# EAGLE board PanelizedBoard (EAGLE 7.2.0), part 1 of 2
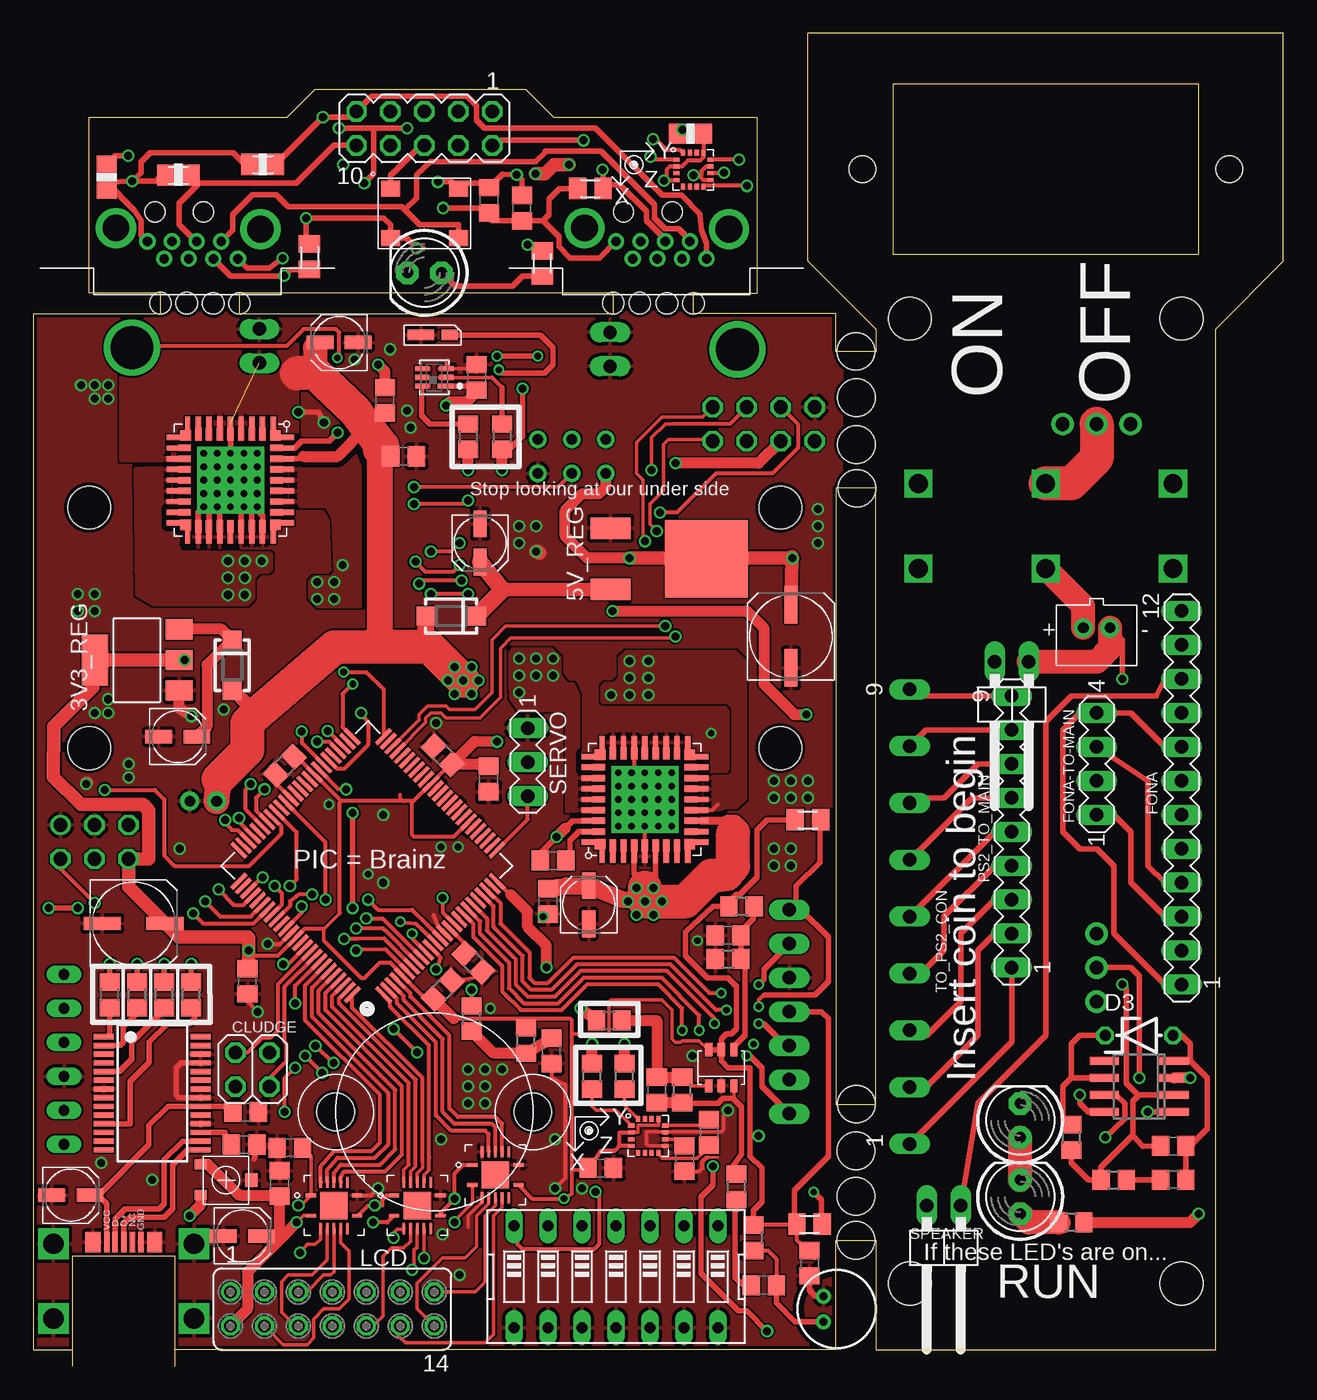
[diagram p0: board, top side]
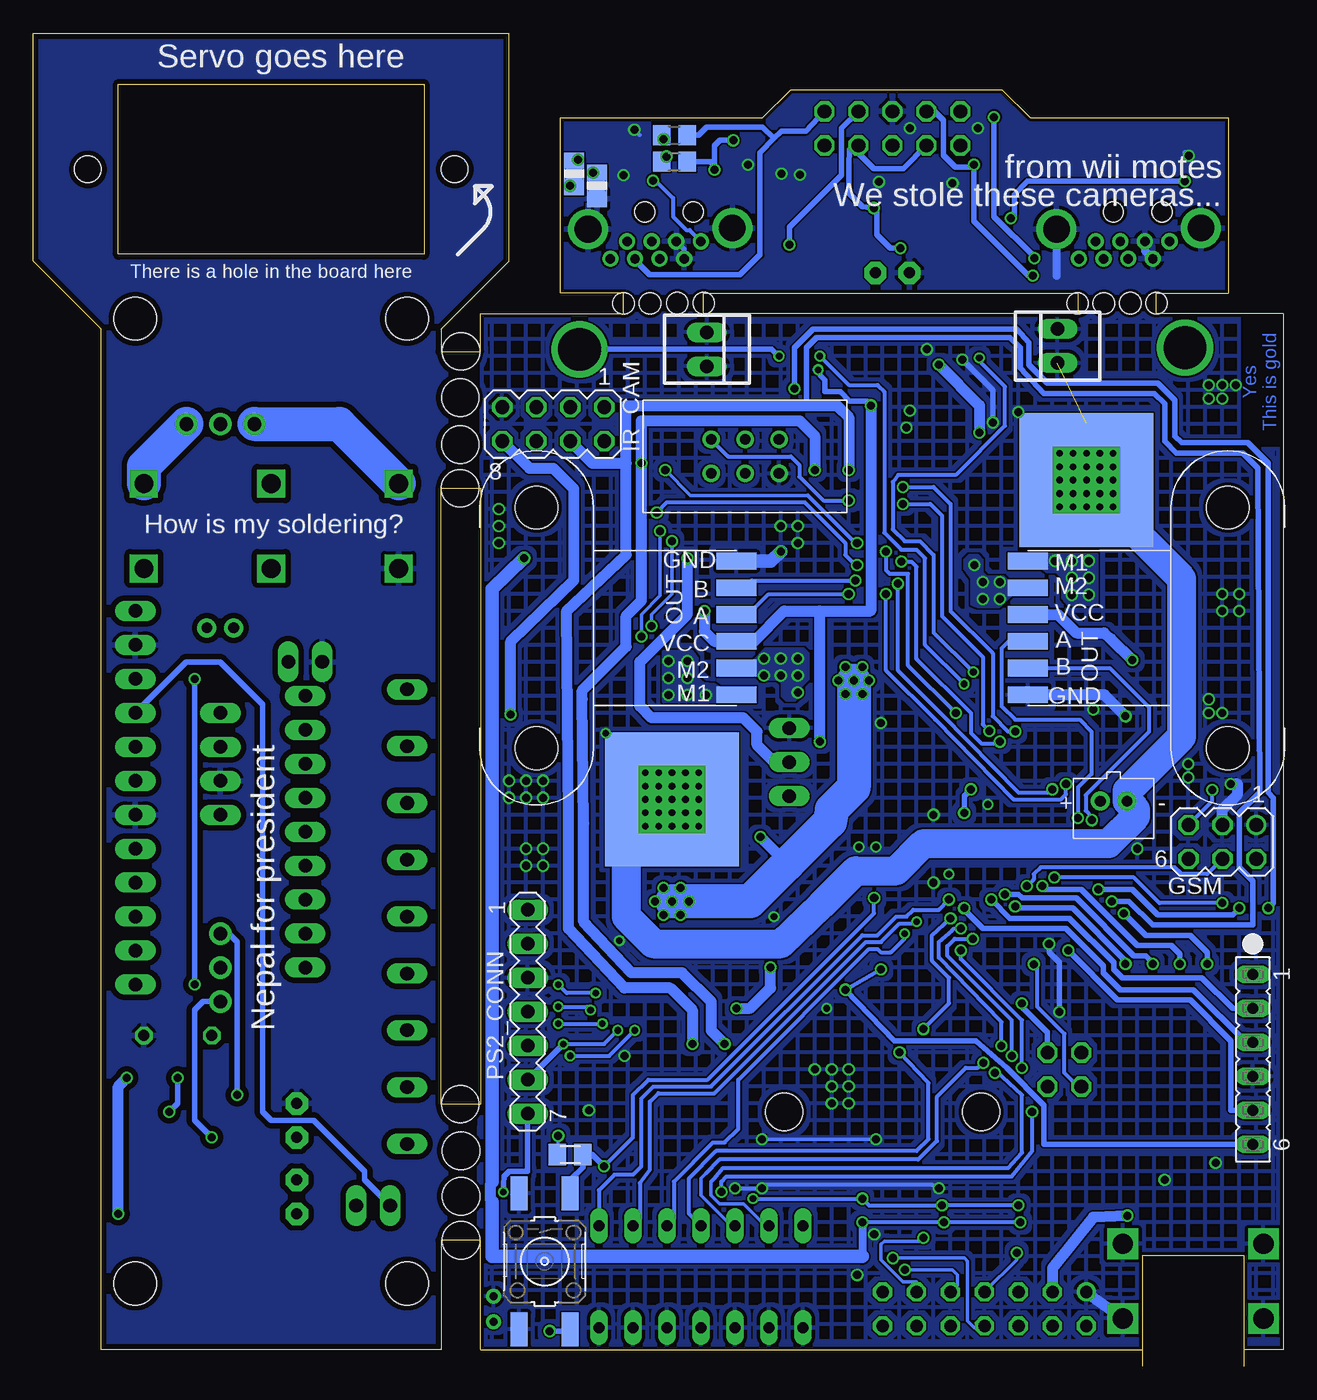
[diagram p1: board, bottom side, seen from below]

Size 93.47 x 99.64 mm. Coordinates in mm from the lower left corner, seen from the top.
Outline: 2.92,1.22 0,1.22 0,78.69 9.52,78.69 9.52,80.24 4.14,80.24 4.14,93.34 18.94,93.34 21.04,95.44 36.84,95.44 38.94,93.34 54.1,93.35 54.1,80.24 49.35,80.24 49.36,78.69 60.02,78.69 60.02,75.87 62.99,75.87 62.99,77.55 57.91,82.63 57.91,99.64 93.47,99.64 93.47,82.63 88.39,77.55 88.39,1.22 62.99,1.22 62.99,9.4 60.02,9.4 60.02,1.22 10.54,1.22
Outline: 87.12,95.83 64.26,95.83 64.26,83.13 87.12,83.13 87.12,95.83
Outline: 15.39,78.69 43.36,78.69 43.36,80.24 15.39,80.24 15.39,78.69
Outline: 62.99,65.63 60.02,65.63 60.02,19.58 62.99,19.58 62.99,65.63
Copper layers (1*16): Top 0.035mm / dielectric 1.5mm / Bottom 0.035mm
Design rules "dirt_cheap_dirty_boards.v1": minimum track width 5mil, minimum drill 12mil, track to track 5mil, track to pad 5mil, pad to pad 5mil, via to via 5mil, smd to smd 0mil, copper to edge 10mil, drill to drill 10mil, minimum pad ring 10mil, minimum via ring 6mil, stop-mask expansion 2mil, vias tented up to drill 25mil, thermal gap 10mil
Holes 2 mm at 89.41,89.48 61.98,89.48
Holes 3.2 mm at 65.53,6.17 85.85,6.17 85.85,78.31 65.53,78.31
Holes 1.6 mm at 15.39,79.45 13.44,79.45 11.46,79.48 9.5,79.48 49.35,79.45 47.37,79.45 45.34,79.48 43.36,79.48
Holes 2.8 mm at 61.49,9.4 61.49,12.7 61.49,16.1 61.54,19.58 61.49,75.87 61.54,72.42 61.54,68.91 61.57,65.63
vRestrict: area 106.2,0.6 to 206.2,100.6

## Footprints (pad centres in the part's own frame; a part is rotated, then mirrored left to right if it is on the bottom)
SOT223 = smd 1.499 x 2.007: 1 -2.261,-3.15; 2 0.025,-3.15; 3 2.311,-3.15 | smd 3.81 x 2.007: 4 0,3.15
DPAK-2 = smd 3 x 1.6: 1 -1.5,0.8; 3 -1.5,5.37 | smd 6.2 x 5.8: 2 -8.68,3.085
UD-4X5,8_NICHICON = smd 2 x 1: + 1.425,0; - -1.425,0
JST-PH-2-THM = drill 0.8 pad 1.422: 1 1,0; 2 -1,0
UD-6,3X5,8_NICHICON = smd 2.8 x 1: + 2.35,0; - -2.35,0
C0805 = smd 1.3 x 1.5: 1 -0.95,0; 2 0.95,0
2X02 = drill 1.016 octagon: 1 -1.27,-1.27; 2 -1.27,1.27; 3 1.27,-1.27; 4 1.27,1.27
SOD123 = smd 1.4 x 1.4: A 1.9,0; C -1.9,0
ZDIO-5 = drill 0.813 octagon: A 2.54,0; C -2.54,0
MA12-1 = drill 1.016 long: 1 -13.97,0; 2 -11.43,0; 3 -8.89,0; 4 -6.35,0; 5 -3.81,0; 6 -1.27,0; 7 1.27,0; 8 3.81,0; 9 6.35,0; 10 8.89,0; 11 11.43,0; 12 13.97,0
MA04-1 = drill 1.016 long: 1 -3.81,0; 2 -1.27,0; 3 1.27,0; 4 3.81,0
MA03-2 = drill 1.016: 1 -2.54,-1.27 | drill 1.016 octagon: 2 -2.54,1.27; 3 0,-1.27; 4 0,1.27; 5 2.54,-1.27; 6 2.54,1.27
SSOP28 = smd 0.4 x 1.5: 1 -4.225,-3.625; 2 -3.575,-3.625; 3 -2.925,-3.625; 4 -2.275,-3.625; 5 -1.625,-3.625; 6 -0.975,-3.625; 7 -0.325,-3.625; 8 0.325,-3.625; 9 0.975,-3.625; 10 1.625,-3.625; 11 2.275,-3.625; 12 2.925,-3.625; 13 3.575,-3.625; 14 4.225,-3.625; 15 4.225,3.625; 16 3.575,3.625; 17 2.925,3.625; 18 2.275,3.625; 19 1.625,3.625; 20 0.975,3.625; 21 0.325,3.625; 22 -0.325,3.625; 23 -0.975,3.625; 24 -1.625,3.625; 25 -2.275,3.625; 26 -2.925,3.625; 27 -3.575,3.625; 28 -4.225,3.625
SO08 = smd 0.6 x 2.2: 1 -1.905,-2.6; 2 -0.635,-2.6; 3 0.635,-2.6; 4 1.905,-2.6; 5 1.905,2.6; 6 0.635,2.6; 7 -0.635,2.6; 8 -1.905,2.6
MA04-2 = drill 1.016 octagon: 1 -3.81,-1.27; 2 -3.81,1.27; 3 -1.27,-1.27; 4 -1.27,1.27; 5 1.27,-1.27; 6 1.27,1.27; 7 3.81,-1.27; 8 3.81,1.27
1X02/90 = drill 1.016 long: 1 -1.27,-3.81; 2 1.27,-3.81
FE07-2 = drill 0.914: 1 -7.62,1.27 | drill 0.914 octagon: 2 -7.62,-1.27; 3 -5.08,1.27; 4 -5.08,-1.27; 5 -2.54,1.27; 6 -2.54,-1.27; 7 0,1.27; 8 0,-1.27; 9 2.54,1.27; 10 2.54,-1.27; 11 5.08,1.27; 12 5.08,-1.27; 13 7.62,1.27; 14 7.62,-1.27
LED5MM = drill 0.813 pad 1.676 octagon: A -1.27,0; K 1.27,0
WM-63PR = drill 0.6 pad 1: 1 -1,0.95; 2 -1,-0.95
1X03-CLEANBIG = drill 1.016 pad 1.676: 1 -2.54,0; 2 0,0; 3 2.54,0
MA07-1 = drill 1.016 long: 1 -7.62,0; 2 -5.08,0; 3 -2.54,0; 4 0,0; 5 2.54,0; 6 5.08,0; 7 7.62,0
MA09-1 = drill 1.016 long: 1 -10.16,0; 2 -7.62,0; 3 -5.08,0; 4 -2.54,0; 5 0,0; 6 2.54,0; 7 5.08,0; 8 7.62,0; 9 10.16,0
R0805 = smd 1.3 x 1.5: 1 -0.95,0; 2 0.95,0
M0805 = smd 1.3 x 1.6: 1 -0.95,0; 2 0.95,0
B3F-10XX = smd 2.54 x 1.27: 1 -5.08,1.905; 2 5.08,1.905; 3 -5.08,-1.905; 4 5.08,-1.905
MA03-1 = drill 1.016 long: 1 -2.54,0; 2 0,0; 3 2.54,0
FE06 = drill 0.813 long: 1 -6.35,0; 2 -3.81,0; 3 -1.27,0; 4 1.27,0; 5 3.81,0; 6 6.35,0
MA05-2 = drill 1.016 octagon: 1 -5.08,-1.27; 2 -5.08,1.27; 3 -2.54,-1.27; 4 -2.54,1.27; 5 0,-1.27; 6 0,1.27; 7 2.54,-1.27; 8 2.54,1.27; 9 5.08,-1.27; 10 5.08,1.27
EDG-07 = drill 0.813 long: 1 -7.62,-3.81; 2 -5.08,-3.81; 3 -2.54,-3.81; 4 0,-3.81; 5 2.54,-3.81; 6 5.08,-3.81; 7 7.62,-3.81; 8 7.62,3.81; 9 5.08,3.81; 10 2.54,3.81; 11 0,3.81; 12 -2.54,3.81; 13 -5.08,3.81; 14 -7.62,3.81
MA09-1' = drill 1.016 long: 1 -17,0; 2 -12.75,0; 3 -8.5,0; 4 -4.25,0; 5 0,0; 6 4.25,0; 7 8.5,0; 8 12.75,0; 9 17,0
TCS3472_FN6 = smd 1.2 x 0.4: P$1 -0.85,0.65 | smd 1 x 0.4: P$2 -0.95,0; P$3 -0.95,-0.65; P$4 0.95,-0.65; P$5 0.95,0; P$6 0.95,0.65
QTFP-100 = smd 1.524 x 0.305: P1 -0.1,13.55; P2 -0.1,13.05; P3 -0.1,12.55; P4 -0.1,12.05; P5 -0.1,11.55; P6 -0.1,11.05; P7 -0.1,10.55; P8 -0.1,10.05; P9 -0.1,9.55; P10 -0.1,9.05; P11 -0.1,8.55; P12 -0.1,8.05; P13 -0.1,7.55; P14 -0.1,7.05; P15 -0.1,6.55; P16 -0.1,6.05; P17 -0.1,5.55; P18 -0.1,5.05; P19 -0.1,4.55; P20 -0.1,4.05; P21 -0.1,3.55; P22 -0.1,3.05; P23 -0.1,2.55; P24 -0.1,2.05; P25 -0.1,1.549; P51 15.2,1.549; P52 15.2,2.05; P53 15.2,2.55; P54 15.2,3.05; P55 15.2,3.55; P56 15.2,4.05; P57 15.2,4.55; P58 15.2,5.05; P59 15.2,5.55; P60 15.2,6.05; P61 15.2,6.55; P62 15.2,7.05; P63 15.2,7.55; P64 15.2,8.05; P65 15.2,8.55; P66 15.2,9.05; P67 15.2,9.55; P68 15.2,10.05; P69 15.2,10.55; P70 15.2,11.05; P71 15.2,11.55; P72 15.2,12.05; P73 15.2,12.55; P74 15.2,13.05; P75 15.2,13.55 | smd 0.305 x 1.524: P26 1.549,-0.1; P27 2.05,-0.1; P28 2.55,-0.1; P29 3.05,-0.1; P30 3.55,-0.1; P31 4.05,-0.1; P32 4.55,-0.1; P33 5.05,-0.1; P34 5.55,-0.1; P35 6.05,-0.1; P36 6.55,-0.1; P38 7.55,-0.1; P39 8.05,-0.1; P40 8.55,-0.1; P41 9.05,-0.1; P42 9.55,-0.1; P43 10.05,-0.1; P44 10.55,-0.1; P45 11.05,-0.1; P46 11.55,-0.1; P47 12.05,-0.1; P48 12.55,-0.1; P49 13.05,-0.1; P50 13.55,-0.1; P76 13.55,15.2; P77 13.05,15.2; P78 12.55,15.2; P79 12.05,15.2; P80 11.55,15.2; P81 11.05,15.2; P82 10.55,15.2; P83 10.05,15.2; P84 9.55,15.2; P85 9.05,15.2; P86 8.55,15.2; P87 8.05,15.2; P88 7.55,15.2; P89 7.05,15.2; P90 6.55,15.2; P91 6.05,15.2; P92 5.55,15.2; P93 5.05,15.2; P94 4.55,15.2; P95 4.05,15.2; P96 3.55,15.2; P97 3.05,15.2; P98 2.55,15.2; P99 2.05,15.2; P100 1.549,15.2; P337 7.05,-0.1
MICRO_USB_FCI = smd 0.406 x 1.524: D+ 0,2.921; D- -0.66,2.921; GND 1.27,2.921; ID 0.66,2.921; VCC -1.27,2.921 | smd 1.143 x 1.524: GND1 -2.311,2.921; GND2 2.311,2.921 | drill 1.524 square: P$1 -5.258,2.794; P$2 -5.258,-2.794; P$3 5.258,-2.794; P$4 5.258,2.794
HMC5883L = smd 0.457 x 0.305: P$1 -1.27,0.762; P$2 -1.27,0.254; P$3 -1.27,-0.254; P$4 -1.27,-0.762; P$9 1.27,-0.762; P$10 1.27,-0.254; P$11 1.27,0.254; P$12 1.27,0.762 | smd 0.305 x 0.457: P$5 -0.762,-1.27; P$6 -0.254,-1.27; P$7 0.254,-1.27; P$8 0.762,-1.27; P$13 0.762,1.27; P$14 0.254,1.27; P$15 -0.254,1.27; P$16 -0.762,1.27
OPA334 = smd 0.55 x 1: P$1 -0.95,-1.35; P$2 0,-1.35; P$3 0.95,-1.35; P$4 0.95,1.35; P$5 0,1.35; P$6 -0.95,1.35
LED = smd 1.2 x 0.8: ANODE -1.15,0 | smd 2 x 0.8: CATHODE 1,0
PVG3G-SMT-TRIMMER = smd 0.75 x 0.9: P$1 0.6,-0.2; P$2 2.9,-0.2 | smd 1 x 0.9: P$3 1.8,3.6
CASTER = hole 2.8: -7.366,0; 7.366,0
MOTOR = smd 3 x 1.25: GND 28,5; M1 28,-5; M2 28,-3; OUTA 28,1; OUTB 28,3; VCC 28,-1 | hole 3.2: 13.05,9; 13.05,-9
PQFN = smd 1 x 0.4: AGND -4.25,0; FB -4.25,-2.4; IN1 -4.25,2.4; IN2 -4.25,3.2; INV -4.25,-1.6; P$58 -4.25,-3.2; P$64 4.25,-3.2; P$65 4.25,-3.2; P$68 4.25,3.2; P$75 -4.25,3.2; PGND_1 4.25,-2.4; PGND_2 4.25,-1.6; PGND_3 4.25,-0.8; PGND_4 4.25,0.8; PGND_5 4.25,1.6; PGND_6 4.25,2.4; SF 4.25,0; SLEW -4.25,1.6; VPWR -4.25,0.8; VPWR1 -4.25,-0.8 | smd 5 x 5: AGND_L 0,0 | smd 0.4 x 1: CCP -2.4,4.25; D1 2.4,4.25; D2 2.4,-4.25; EN -2.4,-4.25; OUT1_1 -0.8,-4.25; OUT1_2 0,-4.25; OUT1_3 0.8,-4.25; OUT1_4 1.6,-4.25; OUT2_1 1.6,4.25; OUT2_2 0.8,4.25; OUT2_3 0,4.25; OUT2_4 -0.8,4.25; P$59 -3.2,-4.25; P$60 -3.2,-4.25; P$63 3.2,-4.25; P$69 3.2,4.25; P$70 3.2,4.25; P$73 -3.2,4.25; VPWR2 -1.6,-4.25; VPWR_2 -1.6,4.25 | smd 0.95 x 0.48: P$1 -3.45,-2.4; P$2 -3.45,-1.6; P$3 -3.45,-0.8; P$4 -3.45,0; P$5 -3.45,0.8; P$6 -3.45,1.6; P$7 -3.45,2.4; P$16 3.45,2.4; P$17 3.45,1.6; P$18 3.45,0.8; P$19 3.45,0; P$20 3.45,-0.8; P$21 3.45,-1.6; P$22 3.45,-2.4 | smd 0.8 x 0.8: P$8 -3.35,-3.35; P$44 3.35,3.35; P$62 3.35,-3.35; P$72 -3.35,3.35 | smd 0.48 x 0.95: P$30 2.4,-3.45; P$31 1.6,-3.45; P$32 0.8,-3.45; P$33 0,-3.45; P$34 -0.8,-3.45; P$35 -1.6,-3.45; P$36 -2.4,-3.45; P$45 -2.4,3.45; P$46 -1.6,3.45; P$47 -0.8,3.45; P$48 0,3.45; P$49 0.8,3.45; P$50 1.6,3.45; P$51 2.4,3.45 | smd 0.78 x 0.78: P$61 -3.35,-3.35; P$66 3.35,-3.35; P$71 3.35,3.35; P$76 -3.35,3.35 | drill 0.5 square: P$77 -2,2; P$80 -1,2; P$81 0,2; P$82 1,2; P$83 2,2; P$84 2,1; P$85 1,1; P$86 0,1; P$87 -1,1; P$88 -2,1; P$89 -2,0; P$90 -1,0; P$91 0,0; P$92 1,0; P$93 2,0; P$94 2,-1; P$95 1,-1; P$96 0,-1; P$97 -1,-1; P$98 -2,-1; P$99 -2,-2; P$100 -1,-2; P$101 0,-2; P$102 1,-2; P$103 2,-2 | smd 10 x 10 bottom: P$78 0,0
S-PVQFN-N14 = smd 0.85 x 0.28: 1 -1.725,0.75; 7 1.725,0.75; 8 1.725,-0.75; 14 -1.725,-0.75 | smd 0.28 x 0.85: 2 -1,1.725; 3 -0.5,1.725; 4 0,1.725; 5 0.5,1.725; 6 1,1.725; 9 1,-1.725; 10 0.5,-1.725; 11 0,-1.725; 12 -0.5,-1.725; 13 -1,-1.725 | smd 2.05 x 2.05: AGND 0,0
PIXY_HEADER = drill 0.8: 1 -2.54,1.27; 2 -2.54,-1.27; 3 0,1.27; 4 0,-1.27; 5 2.54,1.27; 6 2.54,-1.27
DPDT_8.5A = drill 1.4 square: 1.1 -9.525,-3.175; 1.2 0,-3.175; 1.3 9.525,-3.175; 2.1 -9.525,3.175; 2.2 0,3.175; 2.3 9.525,3.175
WII_IR_CAM = drill 0.7: 3V3 0,0; CLK 5.52,0; GND 1.84,0; GND2 1.25,-1.3; NC 3.09,-1.3; RST 6.77,-1.3; SCL 3.68,0; SDA 4.93,-1.3 | drill 2: GND3 -2.35,1; GND4 8.45,0.91 | hole 1.5: 0.56,2.2; 4.2,2.2
CB3LV-3C = smd 1.4 x 1.2: 3V3 5.08,3.7; CLK_OUT 0,3.7; EOH 5.08,0; GND 0,0
22-23-2021 = drill 1 long: 1 -1.27,0; 2 1.27,0

## Placement (x,y rotation side)
3V3_REG  REG1117  [SOT223]  7.75,52.78 90 top
5V_REG  NCP1117-DPAK  [DPAK-2]  41.66,63.45 180 top
10UF  10uF  [UD-4X5,8_NICHICON]  15.62,9.73 0 top
BATT_CON  [JST-PH-2-THM]  12.7,42.24 180 bottom
C1  10uF  [UD-4X5,8_NICHICON]  33.4,61.54 270 top
C2  10uF  [UD-4X5,8_NICHICON]  10.8,47.07 0 top
C3  100uF  [UD-6,3X5,8_NICHICON]  56.64,54.56 90 top
C4  100uF  [UD-6,3X5,8_NICHICON]  7.49,33.1 0 top
C5  0.1uF  [C0805]  15.75,16.56 0 top
C6  10uF  [UD-4X5,8_NICHICON]  2.79,12.78 0 top
C7  0.1uF  [C0805]  15.88,19 0 top
C8  .22uF  [C0805]  50.52,17.48 90 top
C9  4.7uF  [C0805]  48.69,15.52 270 top
C10  0.1uF  [C0805]  42.42,14.81 0 top
C11  1uF  [C0805]  51.94,32.21 180 top
C12  4.7uF  [C0805]  54.61,6.05 180 top
C13  12pF  [C0805]  46.61,20.65 90 top
C14  0.1uF  [C0805]  58.04,7.7 270 top
C15  0.1uF  [C0805]  33.15,73.93 90 top
C16  0.1uF  [C0805]  16,28.78 270 top
C17  0.1uF  [C0805]  19.18,16.33 180 top
C18  0.1uF  [C0805]  30.61,28.14 45 top
C19  0.1uF  [C0805]  30.61,45.67 135 top
C20  0.1uF  [C0805]  18.8,44.91 225 top
C21  0.1uF  [C0805]  18.41,13.67 90 top
C22  33nF  [C0805]  38.86,37.8 0 top
C23  0.1uF  [C0805]  38.48,34.75 270 top
C24  100uF  [UD-4X5,8_NICHICON]  41.53,34.49 90 top
C25  33nF  [C0805]  26.29,72.21 90 top
C26  0.1uF  [C0805]  27.69,68.02 0 top
C27  100uF  [UD-4X5,8_NICHICON]  22.86,76.53 180 top
C28  0.1uF  [C0805]  34.04,43.89 270 top
C29  0.1uF  [C0805]  32.89,30.18 315 top
C30  0.1uF  [C0805]  38.73,23.57 270 top
C31  0.1uF  [C0805]  85.22,16.46 0 top
C32  .1uF  [C0805]  5.48,88.88 90 top
C33  .1uF  [C0805]  36.52,86.58 90 top
C34  .1uF  [C0805]  34.07,87.16 90 top
C35  0.1uF  [C0805]  49.14,92.14 180 top
C36  4.7uF  [C0805]  51.34,88.24 270 bottom
C37  22uF  [C0805]  53.04,89.14 90 bottom
CLUDGE  [2X02]  16.38,22.17 180 top
CN1  [JST-PH-2-THM]  79.5,55.19 180 top
D1  [SOD123]  14.86,52.4 270 top
D2  [SOD123]  31.24,56.08 180 top
D3  [ZDIO-5]  82.68,24.71 0 top
FONA  [MA12-1]  85.85,42.49 90 top
FONA-TO-MAIN  [MA04-1]  79.5,45.03 90 top
GSM  [MA03-2]  4.57,39.19 180 bottom
IC1  FT232RL  [SSOP28]  8.89,20.4 270 top
IC2  TL082D  [SO08]  82.68,20.9 90 top
IR_CAM  [MA04-2]  54.61,70.43 180 bottom
JP2  [1X02/90]  73.15,48.84 180 top
LCD  [FE07-2]  22.35,4.27 0 top
LED1  [LED5MM]  73.79,12.65 90 top
LED2  [LED5MM]  73.79,18.36 90 top
LED3  [LED5MM]  29.24,81.74 180 top
M1  ELECTRET_MICROPHON-WM-63PR  [WM-63PR]  60.07,4.27 0 top
OP_AMP  [1X03-CLEANBIG]  79.5,29.79 90 top
PS2_CONN  [MA07-1]  56.52,26.49 270 bottom
PS2_TO_MAIN  [MA09-1]  73.15,39.95 90 top
R1  10K  [R0805]  52.58,13.41 90 top
R2  1M  [R0805]  48.51,20.65 90 top
R3  10K  [R0805]  80.77,13.92 0 top
R4  2.2K  [R0805]  53.85,9.6 90 top
R5  10K  [R0805]  52.96,34.37 180 top
R6  10K  [R0805]  51.94,30.43 0 top
R7  0  [R0805]  43.05,25.86 0 top
R8  0  [R0805]  41.78,21.67 90 top
R9  0  [R0805]  44.2,21.67 90 top
R10  0  [R0805]  5.71,27.76 90 top
R11  0  [R0805]  9.78,27.76 90 top
R12  0  [R0805]  11.81,27.76 90 top
R13  0  [R0805]  7.75,27.76 90 top
R14  0  [R0805]  32.51,69.48 270 top
R15  0  [R0805]  35.05,69.48 270 top
R16  100  [R0805]  32.77,25.98 90 top
R17  10k  [R0805]  36.83,24.33 90 top
R18  4.7K  [M0805]  53.34,15.82 180 bottom
R19  4.7K  [M0805]  57.91,40.84 180 top
R20  4.7K  [M0805]  58.04,10.62 180 top
R21  22K  [R0805]  85.22,13.92 180 top
R22  4.7K  [R0805]  77.6,17.09 90 top
R23  100  [R0805]  77.6,10.74 180 top
R24  2.2K  [M0805]  10.84,89.04 180 top
R25  2.2K  [M0805]  41.64,88.04 180 top
R26  2.2K  [M0805]  17.14,89.84 180 top
R27  2.2K  [M0805]  20.64,82.94 90 top
R28  100  [M0805]  38.04,82.44 90 top
R29  0  [R0805]  45.54,90.04 0 bottom
R30  0  [R0805]  45.54,92.04 0 bottom
S1  [B3F-10XX]  55.24,7.82 270 bottom
SERVO  [MA03-1]  36.96,45.16 270 top
SPEAKER  [1X02/90]  68.07,8.2 180 top
SV1  [FE06]  2.29,22.94 270 bottom
SV2  [MA05-2]  29.24,92.54 180 top
SW1  [EDG-07]  43.56,6.68 180 top
SWITCH_2  [1X03-CLEANBIG]  79.5,70.43 0 top
TO_PS2_CON  [MA09-1']  65.53,33.6 90 top
U1  TCS34725  [TCS3472_FN6]  29.97,73.93 180 top
U$1  PIC18F97J94  [QTFP-100]  35.69,37.41 135 top
U$2  MICRO_USB  [MICRO_USB_FCI]  6.76,6.35 0 top
U$3  HMC5883L  [HMC5883L]  45.97,17.22 0 top
U$4  OPA334  [OPA334]  51.43,22.3 0 top
U$5  LED  [LED]  29.97,77.1 180 top
U$6  PVG3G-SMD-TRIMMER  [PVG3G-SMT-TRIMMER]  12.7,15.7 270 top
U$7  POLOLU_BALLCASTER  [CASTER]  29.97,19 0 top
U$8  POLOLU_MOTORDRIVE  [MOTOR]  68.9,55.19 0 bottom
U$9  POLOLU_MOTORDRIVE  [MOTOR]  -8.89,55.19 180 bottom
U$10  MOTORDRIVE  [PQFN]  45.72,42.37 90 top
U$11  MOTORDRIVE  [PQFN]  14.73,66.24 270 top
U$12  TXB0104  [S-PVQFN-N14]  22.48,12.01 0 top
U$13  TXB0104  [S-PVQFN-N14]  28.7,12.01 0 top
U$14  TXB0104  [S-PVQFN-N14]  34.54,14.3 0 top
U$15  PIXY  [PIXY_HEADER]  40.26,68.02 0 bottom
U$16  DPDT_8.5A  [DPDT_8.5A]  75.69,62.81 0 top
U$17  WII_IR_CAM  [WII_IR_CAM]  43.56,84.09 0 top
U$18  WII_IR_CAM  [WII_IR_CAM]  8.52,84.09 0 top
U$19  CB3LV-3C  [CB3LV-3C]  31.78,88.03 180 top
U$20  HMC5883L  [HMC5883L]  49.34,89.44 0 top
X1  22-23-2021  [22-23-2021]  16.89,76.28 90 bottom
X2  22-23-2021  [22-23-2021]  43.12,76.02 270 bottom

## Library data of the parts
3V3_REG = burr-brown; MPN: REG1117; OC_FARNELL: 1097566; OC_NEWARK: 14P6981
5V_REG = NCP1117
10UF = rcl; VALUE1: 10uF
BATT_CON CN1 LED1-LED3 OP_AMP SWITCH_2 = adafruit
C1-C37 R1-R17 R21-R23 R29 R30 = rcl
CLUDGE JP2 SPEAKER = HEADER-1X2-SMD
D1-D3 = diode
FONA FONA-TO-MAIN GSM IR_CAM PS2_CONN PS2_TO_MAIN SERVO SV2 = con-lstb; OC_FARNELL: unknown; OC_NEWARK: unknown
IC1 = ftdichip; MPN: FT232RL; OC_FARNELL: 1146032; OC_NEWARK: 91K9918
IC2 = TDA2822; DATA_SHEET: <a href="http://www.ti.com/lit/ds/symlink/tl084a.pdf"> Data sheet </a>
LCD SV1 = con-lsta; OC_FARNELL: unknown; OC_NEWARK: unknown
M1 = microphon
R18-R20 R24-R28 = resistor
S1 = switch-omron-SMD-VARIANT; MPN: B3F-1000; OC_FARNELL: 176432; OC_NEWARK: 36M3542
SW1 = special
TO_PS2_CON = PS2-CONN; OC_FARNELL: unknown; OC_NEWARK: unknown
U1 = microbuilder
U$1 = pic18f97j94
U$2 = MicroUSB_FCI
U$3 U$20 = HMC5883L
U$4 = OPA334
U$5 = Wurth LED 158301240
U$6 = MurataTrimmers
U$7-U$9 = pololu_motordrive
U$10 U$11 = Freescale MotorDriver
U$12-U$14 = TXB0104
U$15 = pixyHeader
U$16 = DPDT_8.5A
U$17 U$18 = WII_IR_CAM
U$19 = CB3LV-3C
X1 X2 = con-molex; MF: MOLEX; MPN: 22-23-2021; OC_FARNELL: 1462926; OC_NEWARK: 25C3832

## Nets
+3V1: FONA-TO-MAIN.4 FONA.1 FONA.8
+3V2: C32.1 C33.1 C34.1 C35.1 R24.2 R25.2 R26.2 R27.2 SV2.4 SV2.8 U$17.3V3 U$18.3V3 U$19.3V3 U$20.P$2 U$20.P$4 U$20.P$13
+3V3: 3V3_REG.2 C4.+ C10.1 C14.1 C15.1 C16.1 C17.1 C18.1 C19.1 C20.1 C28.1 GSM.6 IR_CAM.8 PS2_CONN.4 R4.2 R5.2 R17.2 R18.2 R19.2 R20.2 SV1.5 U1.P$1 U$1.P5 U$1.P32 U$1.P40 U$1.P59 U$1.P88 U$3.P$2 U$3.P$4 U$3.P$13 U$4.P$5 U$4.P$6 U$5.ANODE U$8.VCC U$9.VCC U$12.1 U$12.8 U$13.1 U$13.8 U$14.1 U$14.8
+5V: 5V_REG.2 10UF.+ C3.+ C21.1 LCD.2 SERVO.2 U$6.P$1 U$12.14 U$13.14 U$14.14 U$15.2
ACK: PS2_CONN.7 R20.1 U$1.P18
ATT: PS2_CONN.5 U$1.P20
BUTTON: R18.1 S1.1 S1.2 U$1.P16
CLK: PS2_CONN.6 U$1.P19
CLK1: U$17.CLK U$18.CLK U$19.CLK_OUT
CLUDGE_0: CLUDGE.1 U$1.P93
CLUDGE_1: CLUDGE.2 U$1.P92
CLUDGE_2: CLUDGE.3 U$1.P91
CLUDGE_3: CLUDGE.4 U$1.P90
CMD: PS2_CONN.2 U$1.P23
DAT: PS2_CONN.1 R19.1 U$1.P22
GND: 3V3_REG.1 5V_REG.1 10UF.- BATT_CON.2 C1.- C2.- C3.- C4.- C5.2 C6.- C7.2 C9.2 C10.2 C11.2 C14.2 C15.2 C16.2 C17.2 C18.2 C19.2 C20.2 C21.2 C23.2 C24.- C26.2 C27.- C28.2 C29.2 C30.2 GSM.1 GSM.3 IC1.7 IC1.18 IC1.21 IC1.25 IC1.26 IR_CAM.7 LCD.1 M1.1 PS2_CONN.3 R6.1 S1.3 S1.4 SERVO.1 SV1.4 SW1.8 SW1.9 SW1.10 SW1.11 SW1.12 SW1.13 SW1.14 U1.P$3 U$1.P14 U$1.P31 U$1.P35 U$1.P39 U$1.P64 U$1.P87 U$2.GND U$2.GND1 U$2.GND2 U$2.P$1 U$2.P$2 U$2.P$3 U$2.P$4 U$3.P$9 U$3.P$11 U$4.P$2 U$5.CATHODE U$6.P$3 U$8.GND U$9.GND U$10.AGND U$10.AGND_L U$10.PGND_1 U$10.PGND_2 U$10.PGND_3 U$10.PGND_4 U$10.PGND_5 U$10.PGND_6 U$11.AGND U$11.AGND_L U$11.PGND_1 U$11.PGND_2 U$11.PGND_3 U$11.PGND_4 U$11.PGND_5 U$11.PGND_6 U$12.7 U$13.7 U$14.2 U$14.7 U$14.13 U$15.6 X1.1 X1.2 X2.1 X2.2
GND1: C31.2 D3.A FONA-TO-MAIN.2 FONA.6 FONA.11 IC2.4 JP2.2 LED2.K R21.1 U$16.1.1
GND2: C32.2 C33.2 C34.2 C35.2 C36.2 LED3.K SV2.5 U$17.GND U$17.GND2 U$17.GND3 U$17.GND4 U$18.GND U$18.GND2 U$18.GND3 U$18.GND4 U$19.GND U$20.P$9 U$20.P$11
GSM_RST: GSM.5 U$1.P68
GSM_RX: GSM.4 U$1.P67
GSM_TX: GSM.2 U$1.P78
I2C_SCL: IR_CAM.6 R8.2 R15.2 U$1.P79
I2C_SCL1: IR_CAM.5 U$1.P54
I2C_SDA: IR_CAM.4 R9.2 R14.2 U$1.P81
I2C_SDA1: IR_CAM.3 U$1.P56
L_WHISKER: U$1.P51
LCD_DB0: U$1.P94 U$12.2
LCD_DB1: U$1.P1 U$13.5
LCD_DB2: U$1.P100 U$13.4
LCD_DB3: U$1.P99 U$13.3
LCD_DB4: U$1.P98 U$13.2
LCD_DB5: U$1.P4 U$14.5
LCD_DB6: U$1.P3 U$14.4
LCD_DB7: U$1.P2 U$14.3
LCD_E: U$1.P95 U$12.3
LCD_R/W: U$1.P96 U$12.4
LCD_RS: U$1.P97 U$12.5
LED: R28.2 SV2.3
MCLR: R16.2 SV1.6 U$1.P11
MIC_SIG: R7.1 U$1.P25
MOTOR_LA: U$1.P70 U$8.OUTA
MOTOR_LB: U$1.P69 U$8.OUTB
MOTOR_RA: U$1.P72 U$9.OUTA
MOTOR_RB: U$1.P73 U$9.OUTB
N$1: IC1.1 R10.1
N$2: IC1.5 R11.1
N$3: 5V_REG.3 C1.+ D2.C
N$4: 3V3_REG.3 C2.+ D1.C
N$5: IC1.11 R12.1
N$6: IC1.2 R13.1
N$7: IC1.16 U$2.D-
N$8: IC1.15 U$2.D+
N$9: C5.1 IC1.17
N$10: C6.+ C7.1 IC1.20 U$2.VCC
N$11: C22.2 U$10.CCP
N$12: LCD.3 U$6.P$2
N$13: C12.2 R1.1
N$14: C8.1 U$3.P$8
N$15: C8.2 U$3.P$12
N$16: C9.1 U$3.P$10
N$17: C12.1 M1.2 R4.1
N$18: PS2_TO_MAIN.9 TO_PS2_CON.9
N$19: R8.1 U$3.P$1
N$20: R9.1 U$3.P$16
N$21: C13.1 R1.2 R2.1 U$4.P$3
N$22: C11.1 R5.1 R6.2 U$4.P$4
N$23: PS2_TO_MAIN.8 TO_PS2_CON.8
N$24: C13.2 R2.2 R7.2 U$4.P$1
N$25: PS2_TO_MAIN.7 TO_PS2_CON.7
N$26: R15.1 U1.P$2
N$27: R14.1 U1.P$6
N$28: PS2_TO_MAIN.6 TO_PS2_CON.6
N$29: PS2_TO_MAIN.5 TO_PS2_CON.5
N$30: PS2_TO_MAIN.4 TO_PS2_CON.4
N$31: PS2_TO_MAIN.3 TO_PS2_CON.3
N$32: PS2_TO_MAIN.2 TO_PS2_CON.2
N$33: U$1.P17
N$34: PS2_TO_MAIN.1 TO_PS2_CON.1
N$35: LCD.4 U$12.10
N$36: LCD.5 U$12.11
N$37: LCD.6 U$12.12
N$38: LCD.7 U$12.13
N$39: LCD.8 U$13.10
N$40: LCD.9 U$13.11
N$41: LCD.10 U$13.12
N$42: LCD.11 U$13.13
N$43: LCD.12 U$14.10
N$44: LCD.13 U$14.11
N$45: LCD.14 U$14.12
N$46: U$8.M1 U$10.OUT1_1 U$10.OUT1_2 U$10.OUT1_3 U$10.OUT1_4
N$47: C25.2 U$11.CCP
N$48: C29.1 U$1.P15
N$49: C30.1 R16.1 R17.1
N$50: FONA.10 SPEAKER.1
N$51: FONA.9 SPEAKER.2
N$52: SWITCH_2.1 U$16.2.1
N$53: SWITCH_2.3 U$16.2.3
N$54: SWITCH_2.2 U$16.2.2
N$55: D3.C IC2.6 R22.2
N$56: R3.2 R21.2
N$57: IC2.3 R23.1
N$58: LED1.A R23.2
N$59: IC2.7 OP_AMP.1
N$60: IC2.1 OP_AMP.2
N$61: IC2.8 OP_AMP.3
N$62: LED1.K LED2.A
N$63: CN1.1 U$16.1.2
N$64: SV2.6 U$19.EOH
N$65: LED3.A R28.1
N$66: R29.1 U$20.P$1
N$67: R30.1 U$20.P$16
N$68: C37.1 U$20.P$8
N$69: C37.2 U$20.P$12
N$70: U$8.M2 U$10.OUT2_1 U$10.OUT2_2 U$10.OUT2_3 U$10.OUT2_4
N$71: U$9.M2 U$11.OUT2_1 U$11.OUT2_2 U$11.OUT2_3 U$11.OUT2_4
N$72: U$9.M1 U$11.OUT1_1 U$11.OUT1_2 U$11.OUT1_3 U$11.OUT1_4
N$73: C36.1 U$20.P$10
PGC: SV1.2 U$1.P65
PGD: SV1.3 U$1.P58
PIXY_RX: U$1.P53 U$15.1
PIXY_TX: U$1.P57 U$15.4
R_WHISKER: U$1.P50
RST: R26.1 SV2.9 U$17.RST U$18.RST
RST1: IR_CAM.2 U$1.P47
RST2: IR_CAM.1 U$1.P48
RX: FONA-TO-MAIN.1 FONA.3
SCL: R25.1 R29.2 SV2.2 U$17.SCL
SCL2: R24.1 SV2.10 U$18.SCL
SDA1: R30.2 SV2.1 U$17.SDA
SDA2: R27.1 SV2.7 U$18.SDA
SERVO_SIGNAL: SERVO.3 U$1.P26
SW1: SW1.1 U$1.P13
SW2: SW1.2 U$1.P12
SW3: SW1.3 U$1.P10
SW4: SW1.4 U$1.P9
SW5: SW1.5 U$1.P8
SW6: SW1.6 U$1.P7
SW7: SW1.7 U$1.P6
TX: FONA-TO-MAIN.3 FONA.4
USB_CTS: R12.2 U$1.P86
USB_DTR: R13.2 U$1.P83
USB_RXD: R11.2 U$1.P84
USB_TXD: R10.2 U$1.P82
V+: BATT_CON.1 C22.1 C23.1 C24.+ C25.1 C26.1 C27.+ D1.A D2.A U$10.VPWR U$10.VPWR1 U$10.VPWR2 U$10.VPWR_2 U$11.VPWR U$11.VPWR1 U$11.VPWR2 U$11.VPWR_2
V+1: C31.1 CN1.2 IC2.2 JP2.1 R3.1 R22.1
VCCIO: IC1.4